# Allegro board democ4.brd
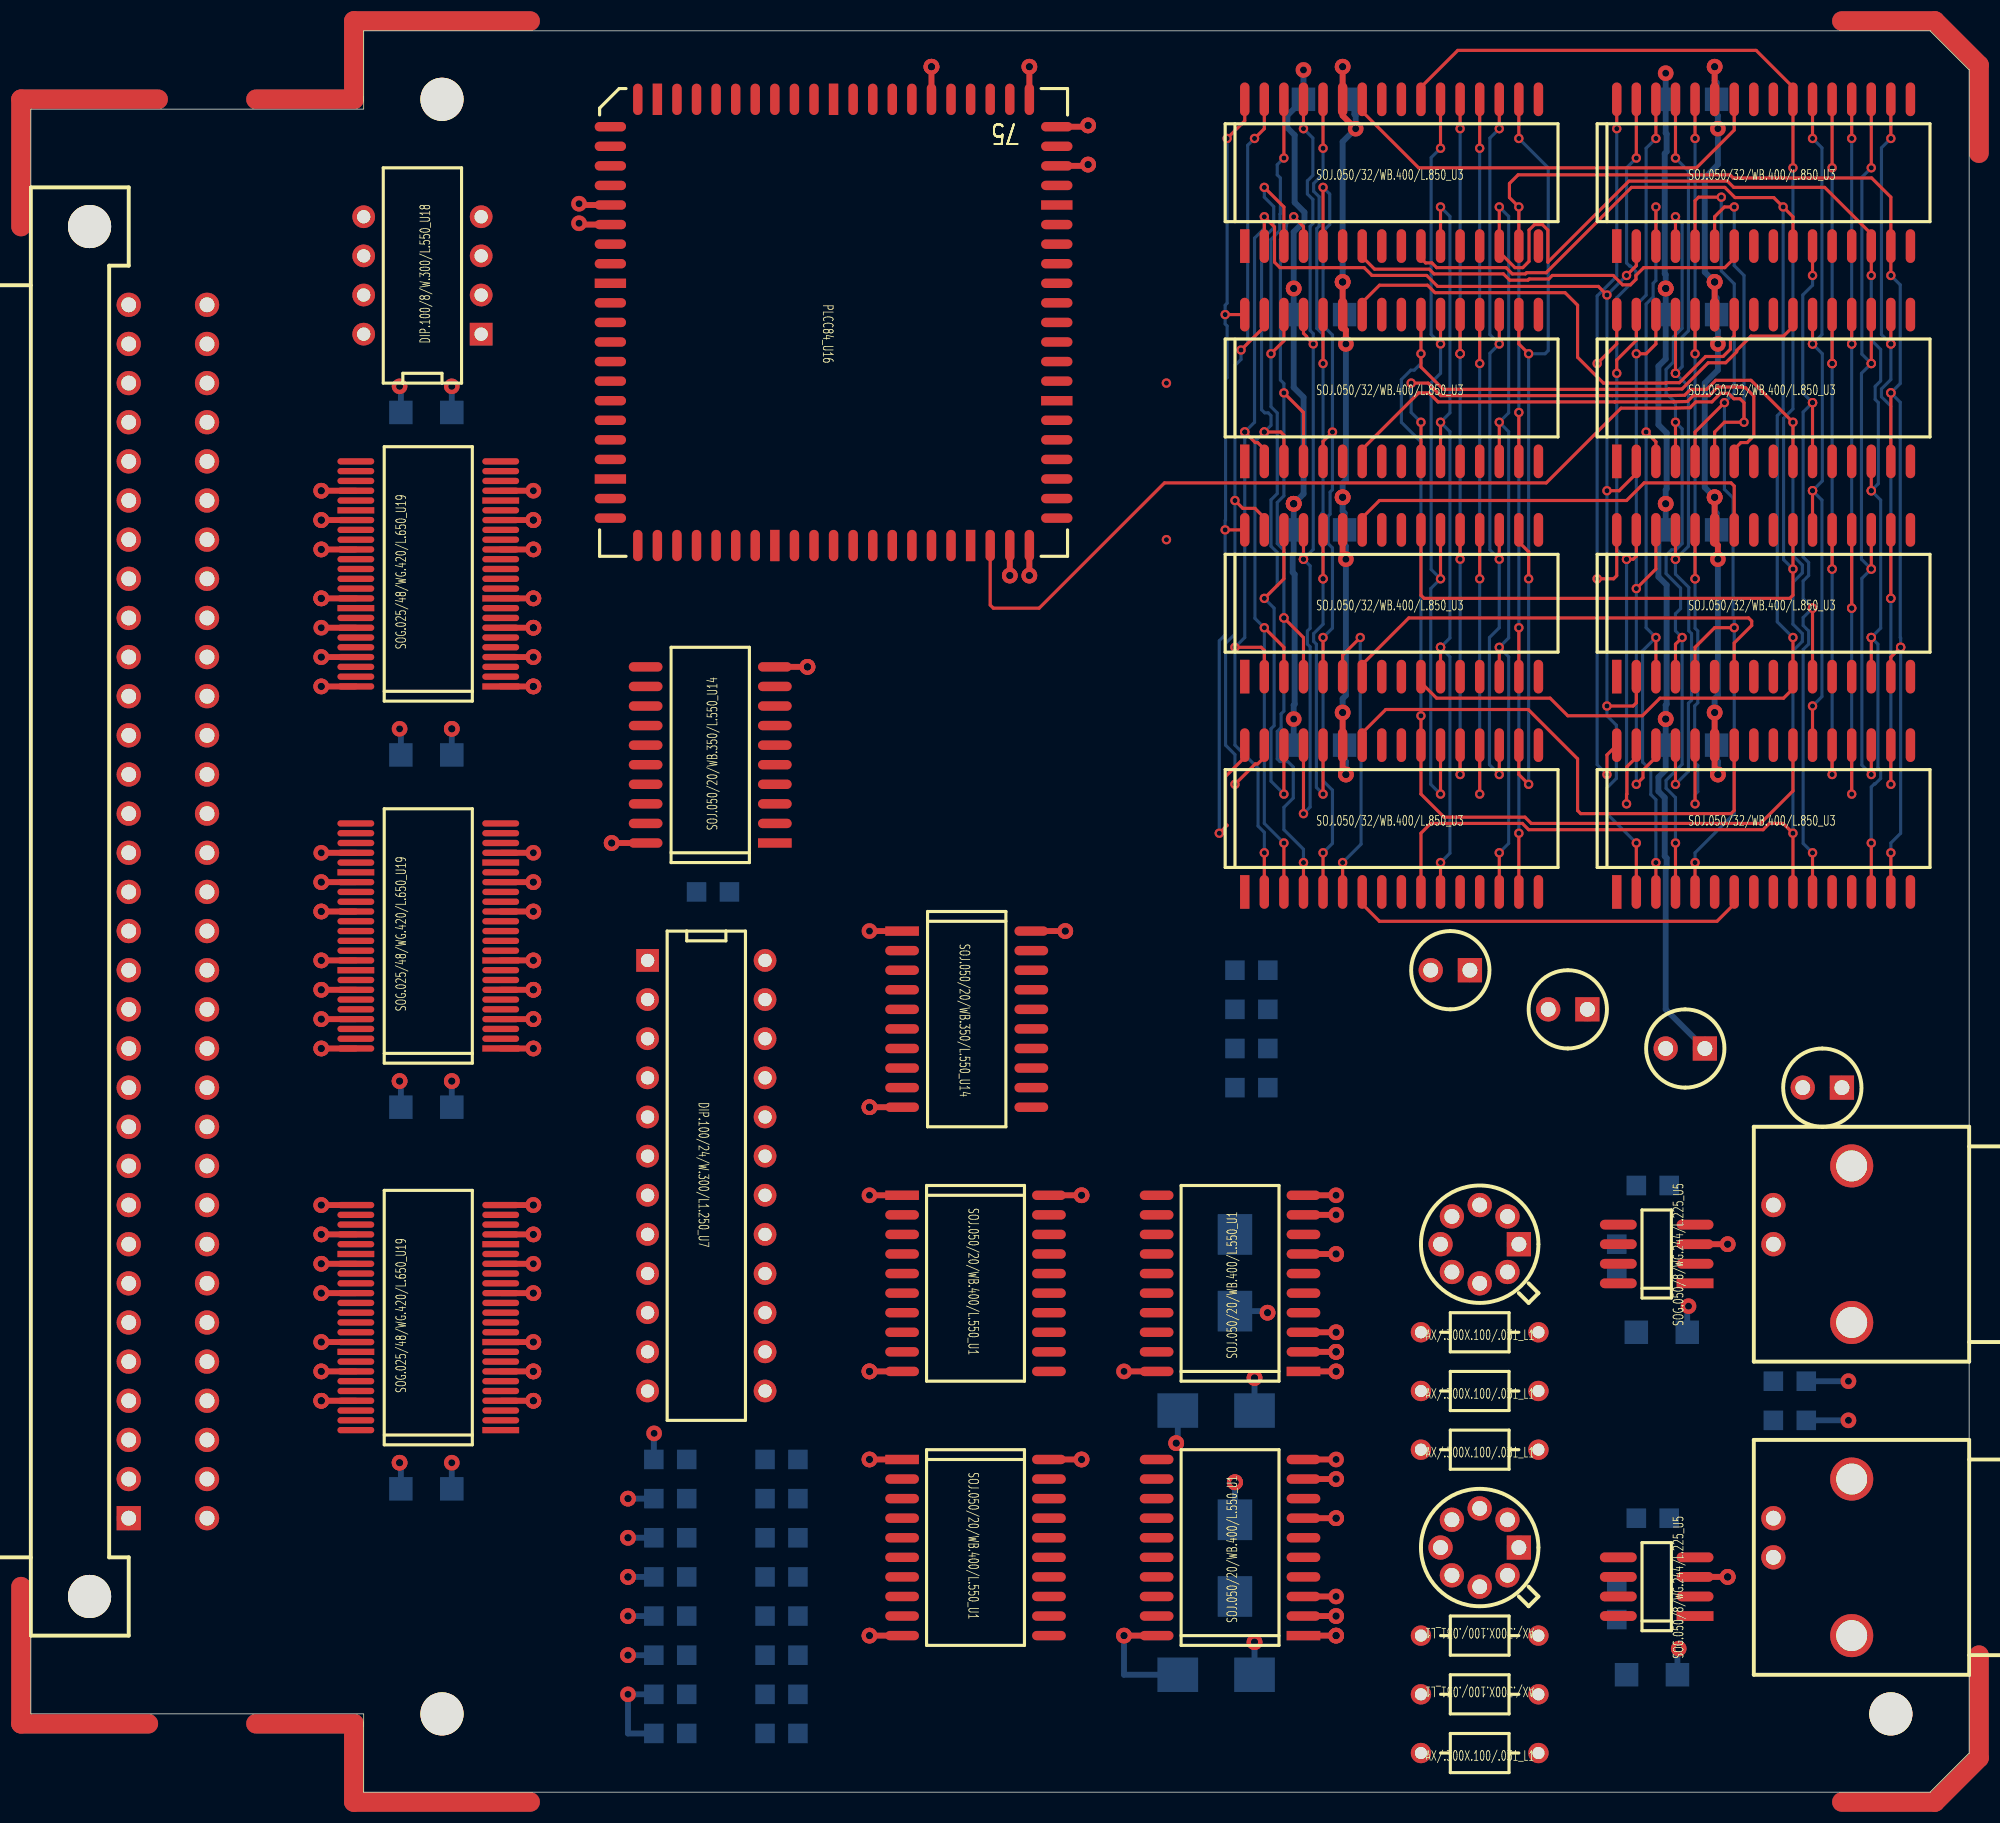
[diagram p0: board, top side]
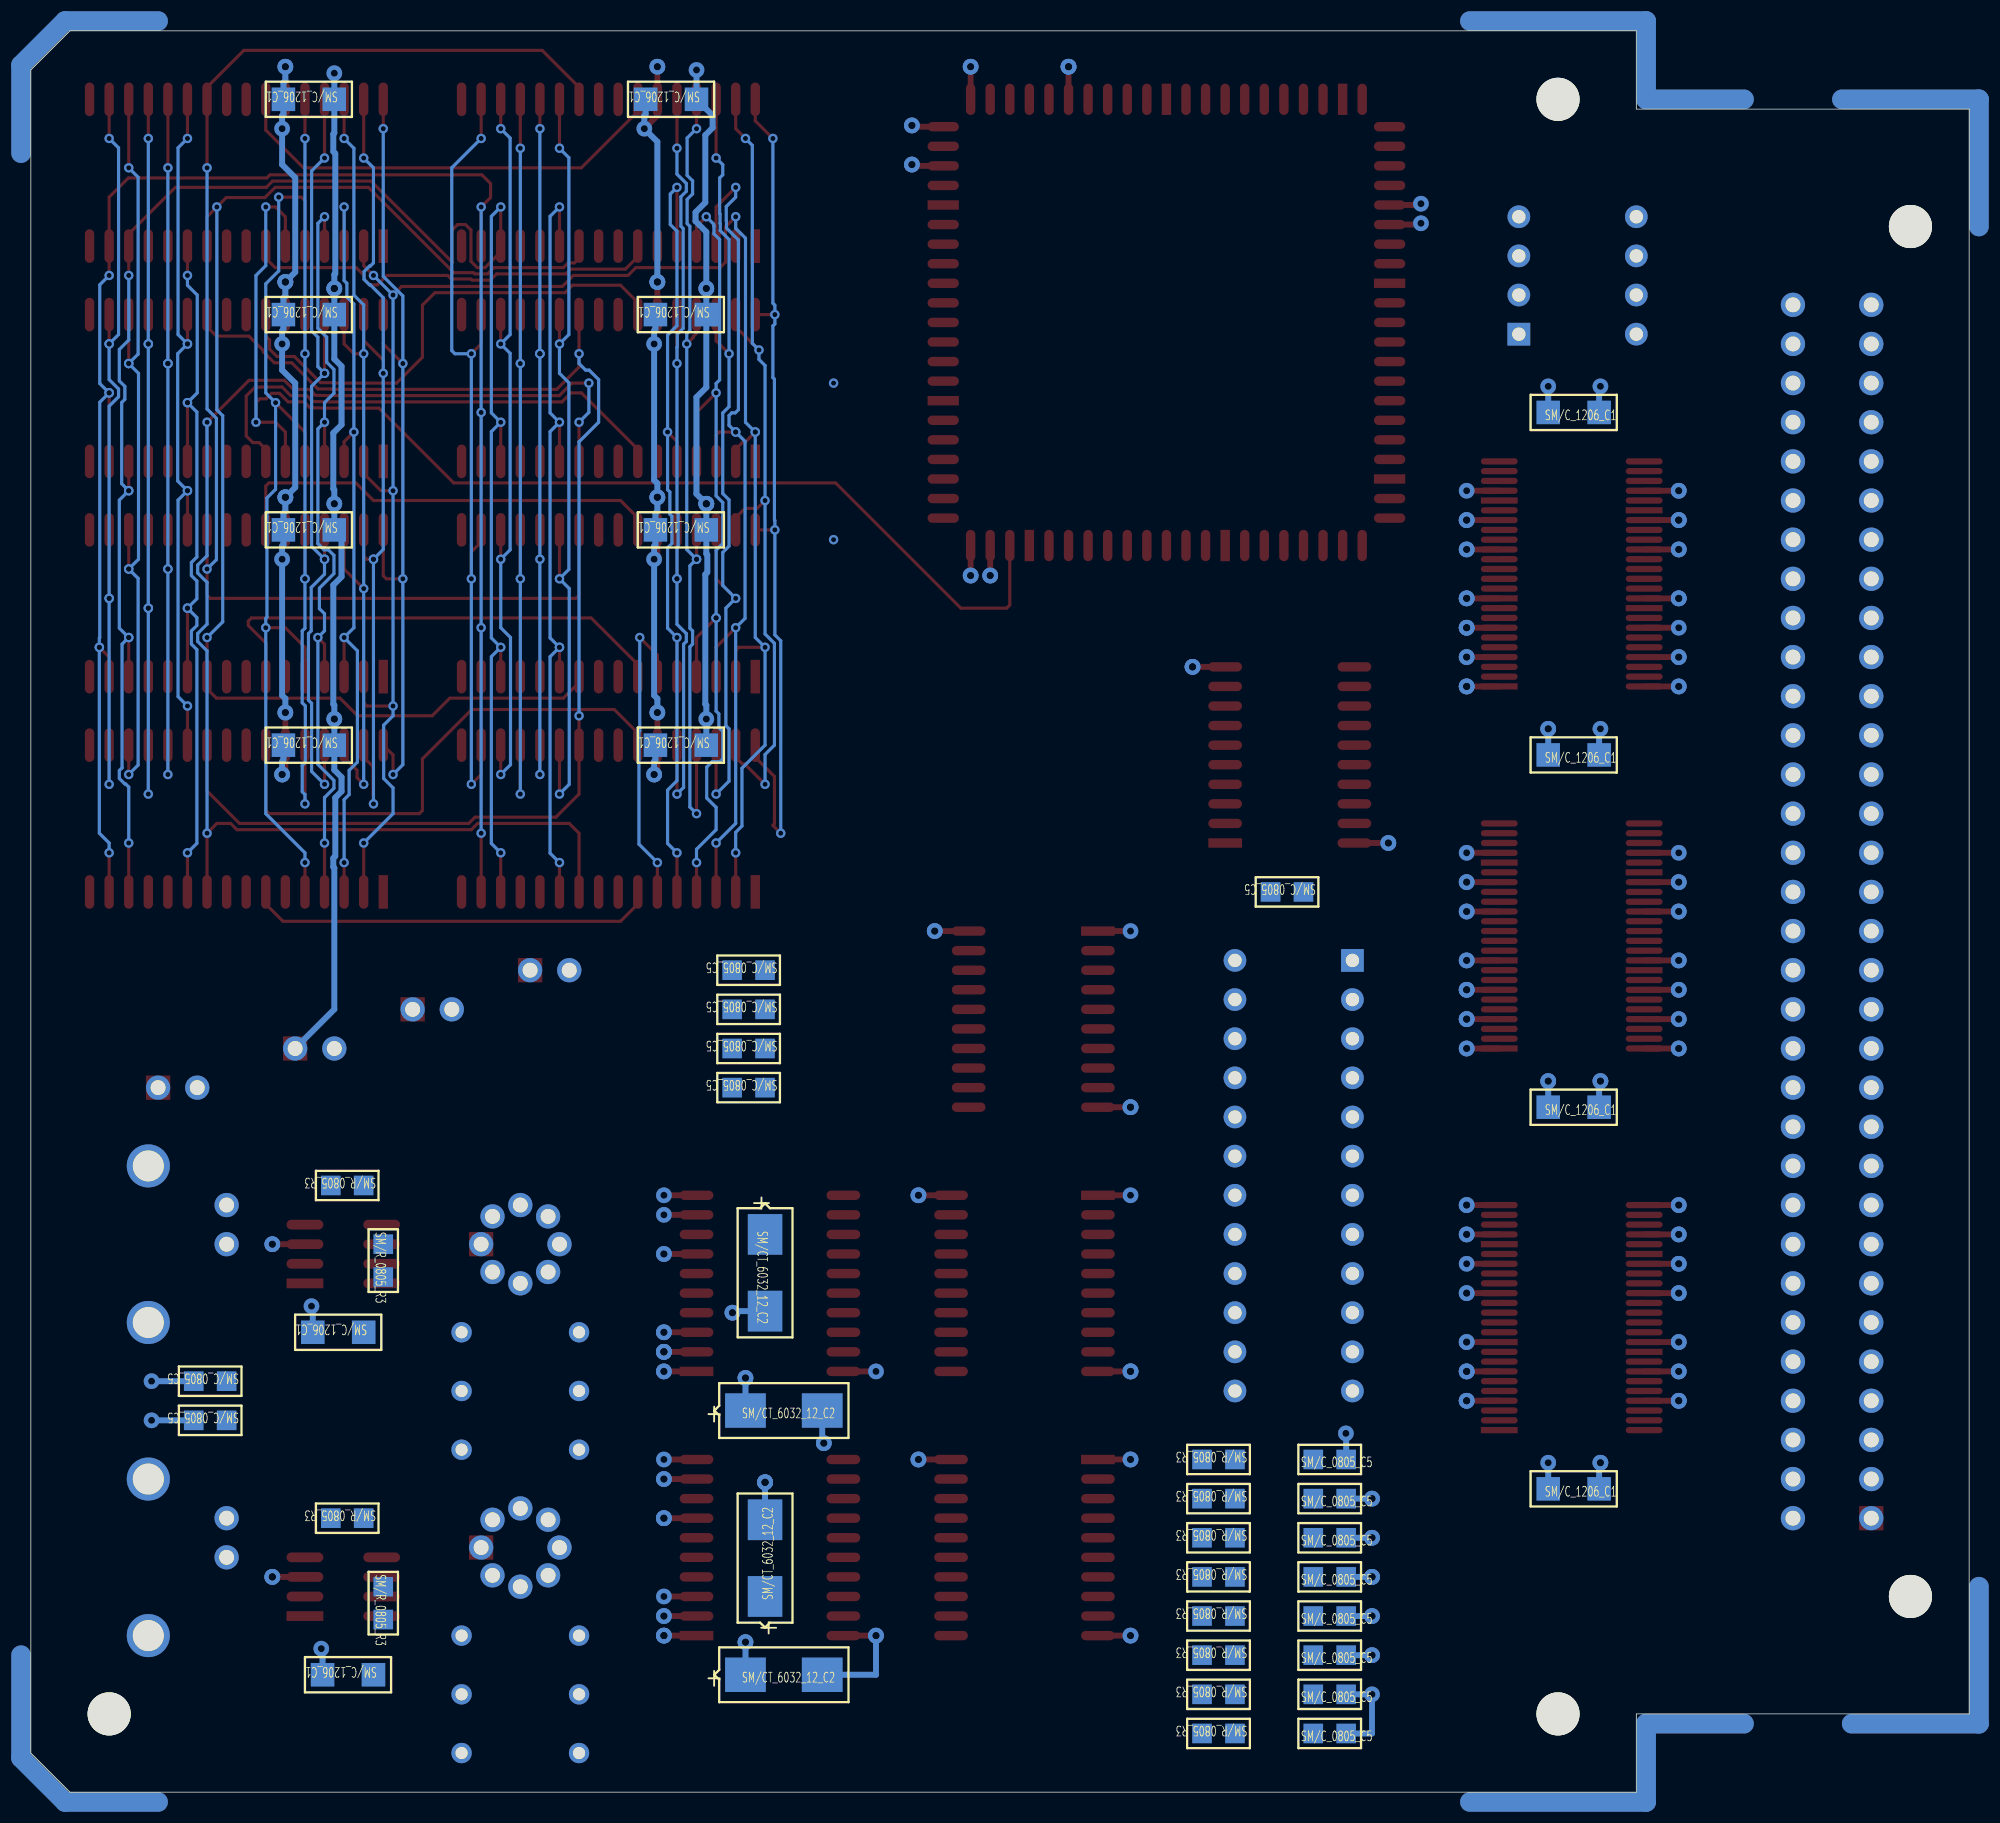
[diagram p1: board, bottom side, seen from below]

Outline 125.73 x 114.3 mm; copper layers: TOP, GND, POWER, BOTTOM. Coordinates in mm from the lower left corner of the outline.
Outline path: 0,109.22 21.59,109.22 21.59,114.3 123.19,114.3 125.73,111.76 125.73,2.54 123.19,0 21.59,0 21.59,5.08 0,5.08 0,109.22

## Design rules (mm)
nets with their own width: min track width 0.203; nets A0 A1 A2 A3 A4 A5 A6 A7 A8 A9 A10 A11 A12 A13 A14 A15 A16 A17 A18 A19 A20 A21 A22 A23 AEN/ BA0 BA1 BA2 BA3 BD0 BD1 BD2 BD3 BD4 BD5 BD6 BD7 BD8 BD9 BD10 BD11 BD12 BD13 BD14 BD15 BRD/ BRESET BWR/ D0 D1 D2 D3 D4 D5 D6 D7 D9 D10 D11 D12 D13 D14 D15 DDIR DEN/ DHEN/ FPGA/ GAIN HS/ MCLK MRD/ MWR/ N00036 N00036_6360 N00038 N00038_6372 N00044 N00044_6366 N00046 N00046_6362 N00048 N00048_6359 N00060 N00060_6368 N00306 N00318 N00322 N00671 N00689 N00703 N00717 N00827 N00831 N00835 N00837 N04966 N05690 N05692 N05694 N05696 N05698 N05700 N05702 N05704 N11940 N11950 N11984 N11994 N12004 N19706 N19710 N19714 N19718 N19934 N19938 N19942 N23417 N23878 N24816 N24821 N24826 N84247 N103899 N255822 N314771 N315146 N315333 N320476 N336036 N336041 OUTA OUTC RA0 RA1 RA2 RA3 RA4 RA5 RA6 RA7 RA8 RA9 RA10 RA11 RA12 RA13 RA14 RA15 RD0 RD1 RD2 RD3 RD4 RD5 RD6 RD7 RDY/ RESET/ SEL VCLKA VCLKC VD0 VD1 VD2 VD3 VD4 VD5 VD6 VD7 WAIT/ WSTAT/
nets with their own width: min track width 0.381; nets AGND GND GND_EARTH V12N V+12 VCC

## Placement (name value [footprint] x y rotation side)
C1  .1UF  [SMC1206]  104.14 29.84 0 bottom
C2  .1UF  [SMCT603212]  79.38 24.77 180 bottom
C3  .1UF  [SMCT603212]  79.38 7.62 180 bottom
C4  .1UF  [SMC1206]  106.05 109.86 0 bottom
C5  3300  [SMC0805]  42.55 6.35 180 bottom
C6  .1UF  [SMC1206]  103.51 7.62 0 bottom
C7  3300  [SMC0805]  42.55 21.59 180 bottom
C8  3300  [SMC0805]  42.55 8.89 180 bottom
C9  .1UF  [SMC1206]  27.3 89.53 180 bottom
C10  .1UF  [SMC1206]  27.3 67.31 180 bottom
C11  .1UF  [SMC1206]  27.3 44.45 180 bottom
C12  .1UF  [SMC1206]  106.05 81.91 0 bottom
C13  .1UF  [SMC1206]  106.05 95.89 0 bottom
C14  .1UF  [SMC1206]  106.05 67.95 0 bottom
C15  .1UF  [SMC1206]  27.3 19.69 180 bottom
C16  3300  [SMC0805]  42.55 11.43 180 bottom
C17  3300  [SMC0805]  42.55 13.97 180 bottom
C18  47PF  [SMC0805]  113.03 26.67 0 bottom
C19  3300  [SMC0805]  42.55 3.81 180 bottom
C20  3300  [SMC0805]  42.55 16.51 180 bottom
C21  .1UF  [SMCT603212]  78.11 12.7 90 bottom
C22  .1UF  [SMCT603212]  78.11 36.2 270 bottom
C23  47PF  [SMC0805]  113.03 24.13 0 bottom
C24  3300  [SMC0805]  42.55 19.05 180 bottom
C25  .1UF  [SMC1206]  82.55 109.86 0 bottom
C26  .1UF  [SMC1206]  81.92 95.89 0 bottom
C27  .1UF  [SMC1206]  81.92 81.91 0 bottom
C28  .1UF  [SMC1206]  81.92 67.95 0 bottom
D1  DIODE PHOTO EMIT  [LED]  100.97 50.8 180 top
D2  DIODE PHOTO EMIT  [LED]  93.34 53.34 180 top
D3  DIODE PHOTO EMIT  [LED]  108.59 48.26 180 top
D4  DIODE PHOTO EMIT  [LED]  117.48 45.72 180 top
J1  CON PAD  [DIN64P]  6.35 17.78 90 top
J2  CHANNEL 1  [BNC2P]  113.03 15.24 270 top
J3  CHANNEL 2  [BNC2P]  113.03 35.56 270 top
L1  50  [AX300X100031]  90.17 22.23 0 top
L2  50  [AX300X100031]  90.17 29.84 0 top
L3  50  [AX300X100031]  97.79 6.35 180 top
L4  50  [AX300X100031]  90.17 26.03 0 top
L5  50  [AX300X100031]  97.79 10.16 180 top
L6  50  [AX300X100031]  90.17 2.54 0 top
MTH1  -  [MTHOLE1]  26.67 109.86 0 top
MTH2  -  [MTHOLE1]  26.67 5.08 0 top
MTH3  -  [MTHOLE1]  120.65 5.08 0 top
R1  150  [SMC0805]  78.11 53.34 0 bottom
R2  150  [SMC0805]  78.11 50.8 0 bottom
R3  100  [SMR0805]  104.14 17.78 0 bottom
R4  100  [SMR0805]  102.87 13.34 270 bottom
R5  100  [SMR0805]  102.87 35.56 270 bottom
R6  100  [SMR0805]  104.14 39.37 0 bottom
R7  50  [SMR0805]  47.62 21.59 0 bottom
R8  50  [SMR0805]  47.62 8.89 0 bottom
R9  50  [SMR0805]  47.62 11.43 0 bottom
R10  50  [SMR0805]  47.62 6.35 0 bottom
R11  50  [SMC0805]  43.18 58.42 0 bottom
R12  150  [SMC0805]  78.11 45.72 0 bottom
R13  50  [SMR0805]  47.62 19.05 0 bottom
R14  50  [SMR0805]  47.62 16.51 0 bottom
R15  50  [SMR0805]  47.62 13.97 0 bottom
R16  50  [SMR0805]  47.62 3.81 0 bottom
R17  150  [SMC0805]  78.11 48.26 0 bottom
U1  TLC5602A  [SOJ05020WB400L550]  82.55 10.16 90 top
U2  TLC5602A  [SOJ05020WB400L550]  82.55 27.3 90 top
U3  TC55B4257J  [SOJ05032WB400L850]  102.87 86.36 0 top
U4  TC55B4257J  [SOJ05032WB400L850]  102.87 100.33 0 top
U5  DG419A  [SOG0508WG244L225]  107.95 33.02 90 top
U6  DG419A  [SOG0508WG244L225]  107.95 11.43 90 top
U7  20L10  [DIP10024W300L1250]  40 53.98 270 top
U8  TC55B4257J  [SOJ05032WB400L850]  78.74 72.39 0 top
U9  TC55B4257J  [SOJ05032WB400L850]  78.74 100.33 0 top
U10  TC55B4257J  [SOJ05032WB400L850]  102.87 72.39 0 top
U11  TC55B4257J  [SOJ05032WB400L850]  102.87 58.42 0 top
U12  TC55B4257J  [SOJ05032WB400L850]  78.74 58.42 0 top
U13  TC55B4257J  [SOJ05032WB400L850]  78.74 86.36 0 top
U14  ACT574  [SOJ05020WB350L550]  56.52 55.88 270 top
U15  ACT574  [SOJ05020WB400L550]  56.52 21.59 270 top
U16  EPF8282  [PLCC84]  52.07 109.86 270 top
U17  ACT574  [SOJ05020WB400L550]  56.52 38.73 270 top
U18  EPC1064  [DIP1008W300L550]  29.21 94.61 90 top
U19  FCT16245  [SOG02548WG420L650]  30.48 71.75 90 top
U20  FCT16245  [SOG02548WG420L650]  30.48 23.49 90 top
U21  FCT16245  [SOG02548WG420L650]  30.48 48.26 90 top
U22  TLE2037A  [TO-99]  96.52 35.56 90 top
U23  TLE2037A  [TO-99]  96.52 15.88 90 top
U25  74ACT574  [SOJ05020WB350L550]  48.26 61.59 90 top

## Library data of the parts
C1-C3 C5-C8 C16 C17 C19-C22 C24 = CAP: alternate symbols: (SMCT603212;SMC0805)
C4 C9-C15 C25-C28 = CAP_NP
C18 C23 = CAPACITOR
D1-D4 = DIODE_PHOTO_EMIT
J1 = 64CONSEPPINS
J2 J3 = BNC
L1-L6 = INDUCTOR
MTH1-MTH3 = MTHOLE1
R1-R17 = R: alternate symbols: (SMR0805)
U1 U2 = TLC5602A
U3 U4 U8-U13 = TC56B4257J
U5 U6 = DG419A
U7 = 20L10
U14 U15 U17 = ACT574: alternate symbols: (SOJ05020WB400L550)
U16 = FPGA_0
U18 = EPC1064
U19-U21 = FCT16245
U22 U23 = TLE2037A
U25 = 74ACT574

## Footprints (pads in the part's own frame, mm; a bottom-side part is the same pattern mirrored in y, then rotated)
AX300X100031
  round 1.321 hole 0.787: 1(0,0) 2(7.62,0)
BNC2P
  round 1.575 hole 0.965: 1(0,0) 2(-2.54,0)
  round 2.794 hole 2.007: 3(5.08,5.08) 4(-5.08,5.08)
DIN64P
  rect 1.575x1.575 hole 0.965: 1(0,0)
  round 1.575 hole 0.965: 2(2.54,0) 3(5.08,0) 4(7.62,0) 5(10.16,0) 6(12.7,0) 7(15.24,0) 8(17.78,0) 9(20.32,0) 10(22.86,0) 11(25.4,0) 12(27.94,0) 13(30.48,0) 14(33.02,0) 15(35.56,0) 16(38.1,0) 17(40.64,0) 18(43.18,0) 19(45.72,0) 20(48.26,0) 21(50.8,0) 22(53.34,0) 23(55.88,0) 24(58.42,0) 25(60.96,0) 26(63.5,0) 27(66.04,0) 28(68.58,0) 29(71.12,0) 30(73.66,0) 31(76.2,0) 32(78.74,0) 33(0,-5.08) 34(2.54,-5.08) 35(5.08,-5.08) 36(7.62,-5.08) 37(10.16,-5.08) 38(12.7,-5.08) 39(15.24,-5.08) 40(17.78,-5.08) 41(20.32,-5.08) 42(22.86,-5.08) 43(25.4,-5.08) 44(27.94,-5.08) 45(30.48,-5.08) 46(33.02,-5.08) 47(35.56,-5.08) 48(38.1,-5.08) 49(40.64,-5.08) 50(43.18,-5.08) 51(45.72,-5.08) 52(48.26,-5.08) 53(50.8,-5.08) 54(53.34,-5.08) 55(55.88,-5.08) 56(58.42,-5.08) 57(60.96,-5.08) 58(63.5,-5.08) 59(66.04,-5.08) 60(68.58,-5.08) 61(71.12,-5.08) 62(73.66,-5.08) 63(76.2,-5.08) 64(78.74,-5.08)
  round 2.794 hole 2.794: 65(83.82,2.54) 66(-5.08,2.54)
DIP1008W300L550
  rect 1.473x1.473 hole 0.864: 1(0,0)
  round 1.473 hole 0.864: 2(2.54,0) 3(5.08,0) 4(7.62,0) 5(7.62,7.62) 6(5.08,7.62) 7(2.54,7.62) 8(0,7.62)
DIP10024W300L1250
  rect 1.473x1.473 hole 0.864: 1(0,0)
  round 1.473 hole 0.864: 2(2.54,0) 3(5.08,0) 4(7.62,0) 5(10.16,0) 6(12.7,0) 7(15.24,0) 8(17.78,0) 9(20.32,0) 10(22.86,0) 11(25.4,0) 12(27.94,0) 13(27.94,7.62) 14(25.4,7.62) 15(22.86,7.62) 16(20.32,7.62) 17(17.78,7.62) 18(15.24,7.62) 19(12.7,7.62) 20(10.16,7.62) 21(7.62,7.62) 22(5.08,7.62) 23(2.54,7.62) 24(0,7.62)
LED
  rect 1.575x1.575 hole 0.965: 1(0,0)
  round 1.575 hole 0.965: 2(2.54,0)
MTHOLE1
  round 2.794 hole 2.794: 1(0,0)
PLCC84
  rect 2.032x0.61 smd: 1(0,0) 10(0,-11.43) 40(28.956,-3.81) 50(28.956,8.89)
  oval 2.032x0.61 smd: 2(0,-1.27) 3(0,-2.54) 4(0,-3.81) 5(0,-5.08) 6(0,-6.35) 7(0,-7.62) 8(0,-8.89) 9(0,-10.16) 11(0,-12.7) 33(28.956,-12.7) 34(28.956,-11.43) 35(28.956,-10.16) 36(28.956,-8.89) 37(28.956,-7.62) 38(28.956,-6.35) 39(28.956,-5.08) 41(28.956,-2.54) 42(28.956,-1.27) 43(28.956,0) 44(28.956,1.27) 45(28.956,2.54) 46(28.956,3.81) 47(28.956,5.08) 48(28.956,6.35) 49(28.956,7.62) 51(28.956,10.16) 52(28.956,11.43) 53(28.956,12.7) 75(0,12.7) 76(0,11.43) 77(0,10.16) 78(0,8.89) 79(0,7.62) 80(0,6.35) 81(0,5.08) 82(0,3.81) 83(0,2.54) 84(0,1.27)
  oval 0.61x2.032 smd: 12(1.778,-14.478) 13(3.048,-14.478) 14(4.318,-14.478) 15(5.588,-14.478) 16(6.858,-14.478) 17(8.128,-14.478) 18(9.398,-14.478) 19(10.668,-14.478) 21(13.208,-14.478) 22(14.478,-14.478) 23(15.748,-14.478) 24(17.018,-14.478) 25(18.288,-14.478) 26(19.558,-14.478) 27(20.828,-14.478) 28(22.098,-14.478) 29(23.368,-14.478) 31(25.908,-14.478) 32(27.178,-14.478) 54(27.178,14.478) 55(25.908,14.478) 56(24.638,14.478) 57(23.368,14.478) 58(22.098,14.478) 59(20.828,14.478) 61(18.288,14.478) 62(17.018,14.478) 63(15.748,14.478) 64(14.478,14.478) 65(13.208,14.478) 66(11.938,14.478) 67(10.668,14.478) 68(9.398,14.478) 69(8.128,14.478) 71(5.588,14.478) 72(4.318,14.478) 73(3.048,14.478) 74(1.778,14.478)
  rect 0.61x2.032 smd: 20(11.938,-14.478) 30(24.638,-14.478) 60(19.558,14.478) 70(6.858,14.478)
SMC0805
  rect 1.27x1.27 smd: 1(0,0) 2(2.134,0)
SMC1206
  rect 1.524x1.524 smd: 1(0,0) 2(3.302,0)
SMCT603212
  rect 2.642x2.235 smd: 1(0,0) 2(4.978,0)
SMR0805
  rect 1.27x1.27 smd: 1(0,0) 2(2.134,0)
SOG0508WG244L225
  rect 0.635x2.388 smd: 1(0,0)
  oval 0.635x2.388 smd: 2(1.27,0) 3(2.54,0) 4(3.81,0) 5(3.81,4.978) 6(2.54,4.978) 7(1.27,4.978) 8(0,4.978)
SOG02548WG420L650
  rect 0.406x2.388 smd: 1(0,0) 10(5.715,0) 20(12.065,0) 30(11.43,9.398) 40(5.08,9.398)
  oval 0.406x2.388 smd: 2(0.635,0) 3(1.27,0) 4(1.905,0) 5(2.54,0) 6(3.175,0) 7(3.81,0) 8(4.445,0) 9(5.08,0) 11(6.35,0) 12(6.985,0) 13(7.62,0) 14(8.255,0) 15(8.89,0) 16(9.525,0) 17(10.16,0) 18(10.795,0) 19(11.43,0) 21(12.7,0) 22(13.335,0) 23(13.97,0) 24(14.605,0) 25(14.605,9.398) 26(13.97,9.398) 27(13.335,9.398) 28(12.7,9.398) 29(12.065,9.398) 31(10.795,9.398) 32(10.16,9.398) 33(9.525,9.398) 34(8.89,9.398) 35(8.255,9.398) 36(7.62,9.398) 37(6.985,9.398) 38(6.35,9.398) 39(5.715,9.398) 41(4.445,9.398) 42(3.81,9.398) 43(3.175,9.398) 44(2.54,9.398) 45(1.905,9.398) 46(1.27,9.398) 47(0.635,9.398) 48(0,9.398)
SOJ05020WB350L550
  rect 0.61x2.184 smd: 1(0,0)
  oval 0.61x2.184 smd: 2(1.27,0) 3(2.54,0) 4(3.81,0) 5(5.08,0) 6(6.35,0) 7(7.62,0) 8(8.89,0) 9(10.16,0) 10(11.43,0) 11(11.43,8.382) 12(10.16,8.382) 13(8.89,8.382) 14(7.62,8.382) 15(6.35,8.382) 16(5.08,8.382) 17(3.81,8.382) 18(2.54,8.382) 19(1.27,8.382) 20(0,8.382)
SOJ05020WB400L550
  rect 0.61x2.184 smd: 1(0,0)
  oval 0.61x2.184 smd: 2(1.27,0) 3(2.54,0) 4(3.81,0) 5(5.08,0) 6(6.35,0) 7(7.62,0) 8(8.89,0) 9(10.16,0) 10(11.43,0) 11(11.43,9.525) 12(10.16,9.525) 13(8.89,9.525) 14(7.62,9.525) 15(6.35,9.525) 16(5.08,9.525) 17(3.81,9.525) 18(2.54,9.525) 19(1.27,9.525) 20(0,9.525)
SOJ05032WB400L850
  rect 0.61x2.184 smd: 1(0,0)
  oval 0.61x2.184 smd: 2(1.27,0) 3(2.54,0) 4(3.81,0) 5(5.08,0) 6(6.35,0) 7(7.62,0) 8(8.89,0) 9(10.16,0) 10(11.43,0) 11(12.7,0) 12(13.97,0) 13(15.24,0) 14(16.51,0) 15(17.78,0) 16(19.05,0) 17(19.05,9.525) 18(17.78,9.525) 19(16.51,9.525) 20(15.24,9.525) 21(13.97,9.525) 22(12.7,9.525) 23(11.43,9.525) 24(10.16,9.525) 25(8.89,9.525) 26(7.62,9.525) 27(6.35,9.525) 28(5.08,9.525) 29(3.81,9.525) 30(2.54,9.525) 31(1.27,9.525) 32(0,9.525)
TO-99
  rect 1.575x1.575 hole 0.965: 1(0,0)
  round 1.575 hole 0.965: 2(1.803,0.737) 3(2.54,2.54) 4(1.803,4.343) 5(0,5.08) 6(-1.803,4.343) 7(-2.54,2.54) 8(-1.803,0.737)

## Nets
AGND: C1.2(TP-2) C6.2(TP-2) C21.2(TP-2) C22.2(TP-2) J1.1(TP-1) J1.2(TP-2) J1.33(TP-33) U1.3(TP-3) U1.7(TP-7) U1.10(TP-10) U2.3(TP-3) U2.7(TP-7) U2.10(TP-10) U5.3(TP-3) U6.3(TP-3)
GND: C2.2(TP-2) C3.2(TP-2) C4.2(TP-2) C5.2(TP-2) C7.2(TP-2) C8.2(TP-2) C9.2(TP-2) C10.2(TP-2) C11.2(TP-2) C12.2(TP-2) C13.2(TP-2) C14.2(TP-2) C15.2(TP-2) C16.2(TP-2) C17.2(TP-2) C19.2(TP-2) C20.2(TP-2) C24.2(TP-2) C25.2(TP-2) C26.2(TP-2) C27.2(TP-2) C28.2(TP-2) J1.3(TP-3) J1.34(TP-34) J1.35(TP-35) J1.36(TP-36) U1.1(TP-1) U1.20(TP-20) U2.1(TP-1) U2.20(TP-20) U3.27(TP-27) U4.27(TP-27) U7.11(TP-11) U7.12(TP-12) U7.13(TP-13) U8.27(TP-27) U9.27(TP-27) U10.27(TP-27) U11.27(TP-27) U12.27(TP-27) U13.27(TP-27) U14.1(TP-1) U14.10(TP-10) U15.1(TP-1) U15.10(TP-10) U16.17(TP-17) U16.53(TP-53) U16.74(TP-74) U16.75(TP-75) U17.1(TP-1) U17.10(TP-10) U19.1(TP-1) U19.4(TP-4) U19.10(TP-10) U19.15(TP-15) U19.21(TP-21) U19.28(TP-28) U19.34(TP-34) U19.39(TP-39) U19.45(TP-45) U19.48(TP-48) U20.4(TP-4) U20.10(TP-10) U20.15(TP-15) U20.21(TP-21) U20.24(TP-24) U20.25(TP-25) U20.28(TP-28) U20.34(TP-34) U20.39(TP-39) U20.45(TP-45) U21.1(TP-1) U21.4(TP-4) U21.10(TP-10) U21.15(TP-15) U21.21(TP-21) U21.28(TP-28) U21.34(TP-34) U21.39(TP-39) U21.45(TP-45) U21.48(TP-48) U25.10(TP-10)
GND_EARTH: C18.2(TP-2) C23.2(TP-2) J2.2(TP-2) J3.2(TP-2)
V12N: J1.31(TP-31) J1.32(TP-32) U5.7(TP-7) U6.7(TP-7) U22.4(TP-4) U23.4(TP-4)
VCC: C2.1(TP-1) C3.1(TP-1) C4.1(TP-1) C9.1(TP-1) C10.1(TP-1) C11.1(TP-1) C12.1(TP-1) C13.1(TP-1) C14.1(TP-1) C15.1(TP-1) C25.1(TP-1) C26.1(TP-1) C27.1(TP-1) C28.1(TP-1) D1.1(TP-1) D2.1(TP-1) D3.1(TP-1) D4.1(TP-1) J1.29(TP-29) J1.30(TP-30) J1.62(TP-62) L2.1(TP-1) L6.1(TP-1) U1.2(TP-2) U1.9(TP-9) U2.2(TP-2) U2.9(TP-9) U7.24(TP-24) U14.20(TP-20) U15.20(TP-20) U16.16(TP-16) U16.52(TP-52) U16.72(TP-72) U16.80(TP-80) U17.20(TP-20) U19.7(TP-7) U19.18(TP-18) U19.31(TP-31) U19.42(TP-42) U20.7(TP-7) U20.18(TP-18) U20.31(TP-31) U20.42(TP-42) U21.7(TP-7) U21.18(TP-18) U21.31(TP-31) U21.42(TP-42) U25.20(TP-20)
A0: J1.54(TP-54) U19.47(TP-47)
A1: J1.55(TP-55) U19.46(TP-46)
A2: J1.56(TP-56) U19.44(TP-44)
A3: J1.57(TP-57) U19.43(TP-43)
A4: J1.58(TP-58) U19.41(TP-41)
A5: J1.59(TP-59) U19.40(TP-40)
A6: J1.60(TP-60) U19.38(TP-38)
A7: J1.61(TP-61) U19.37(TP-37)
A8: J1.13(TP-13) U21.47(TP-47)
A9: J1.14(TP-14) U21.46(TP-46)
A10: J1.15(TP-15) U21.44(TP-44)
A11: J1.16(TP-16) U21.43(TP-43)
A12: J1.17(TP-17) U21.41(TP-41)
A13: J1.18(TP-18) U21.40(TP-40)
A14: J1.19(TP-19) U21.38(TP-38)
A15: J1.20(TP-20) U21.37(TP-37)
A16: J1.37(TP-37) U20.36(TP-36)
A17: J1.38(TP-38) U20.35(TP-35)
A18: J1.39(TP-39) U7.6(TP-6) U20.33(TP-33)
A19: J1.40(TP-40) U7.5(TP-5) U20.32(TP-32)
A20: J1.41(TP-41) U7.4(TP-4) U20.30(TP-30)
A21: J1.42(TP-42) U7.3(TP-3) U20.29(TP-29)
A22: J1.43(TP-43) U7.2(TP-2) U20.27(TP-27)
A23: J1.44(TP-44) U7.1(TP-1) U20.26(TP-26)
AEN/: J1.47(TP-47) U7.8(TP-8)
BA0: U16.6(TP-6) U19.2(TP-2) U20.13(TP-13) U21.2(TP-2)
BA1: U16.7(TP-7) U19.3(TP-3) U20.14(TP-14) U21.3(TP-3)
BA2: U16.8(TP-8) U19.5(TP-5) U20.16(TP-16) U21.5(TP-5)
BA3: U16.9(TP-9) U19.6(TP-6) U20.17(TP-17) U21.6(TP-6)
BD0: U16.25(TP-25) U19.13(TP-13)
BD1: U16.24(TP-24) U19.14(TP-14)
BD2: U16.23(TP-23) U19.16(TP-16)
BD3: U16.22(TP-22) U19.17(TP-17)
BD4: U16.21(TP-21) U19.19(TP-19)
BD5: U16.20(TP-20) U19.20(TP-20)
BD6: U16.19(TP-19) U19.22(TP-22)
BD7: U16.18(TP-18) U19.23(TP-23)
BD8: U20.2(TP-2) U21.23(TP-23)
BD9: U20.3(TP-3) U21.22(TP-22)
BD10: U20.5(TP-5) U21.20(TP-20)
BD11: U20.6(TP-6) U21.19(TP-19)
BD12: U20.8(TP-8) U21.17(TP-17)
BD13: U20.9(TP-9) U21.16(TP-16)
BD14: U20.11(TP-11) U21.14(TP-14)
BD15: U20.12(TP-12) U21.13(TP-13)
BRD/: U7.15(TP-15) U16.73(TP-73)
BRESET: U7.14(TP-14) U16.12(TP-12)
BWR/: U7.16(TP-16) U16.54(TP-54)
D0: J1.28(TP-28) U19.26(TP-26) U21.26(TP-26)
D1: J1.27(TP-27) U19.27(TP-27) U21.27(TP-27)
D2: J1.26(TP-26) U19.29(TP-29) U21.29(TP-29)
D3: J1.25(TP-25) U19.30(TP-30) U21.30(TP-30)
D4: J1.24(TP-24) U19.32(TP-32) U21.32(TP-32)
D5: J1.23(TP-23) U19.33(TP-33) U21.33(TP-33)
D6: J1.4(TP-4) J1.22(TP-22) U19.35(TP-35) U20.47(TP-47) U21.35(TP-35)
D7: J1.21(TP-21) U19.36(TP-36) U21.36(TP-36)
D9: J1.5(TP-5) U20.46(TP-46)
D10: J1.6(TP-6) U20.44(TP-44)
D11: J1.7(TP-7) U20.43(TP-43)
D12: J1.8(TP-8) U20.41(TP-41)
D13: J1.9(TP-9) U20.40(TP-40)
D14: J1.10(TP-10) U20.38(TP-38)
D15: J1.11(TP-11) U20.37(TP-37)
DDIR: U7.19(TP-19) U19.24(TP-24) U20.1(TP-1) U21.24(TP-24)
DEN/: U7.20(TP-20) U19.25(TP-25) U20.48(TP-48)
DHEN/: U7.21(TP-21) U21.25(TP-25)
FPGA/: U7.17(TP-17) U16.30(TP-30)
GAIN: U5.6(TP-6) U6.6(TP-6) U16.28(TP-28)
HS/: U7.18(TP-18) U16.29(TP-29)
MCLK: J1.52(TP-52) U16.31(TP-31)
MRD/: J1.46(TP-46) U7.9(TP-9)
MWR/: J1.45(TP-45) U7.10(TP-10)
N00036_6360: L6.2(TP-2) R3.1(TP-1) R4.1(TP-1) U1.5(TP-5) U1.8(TP-8) U6.5(TP-5)
N00038_6372: C21.1(TP-1) L3.2(TP-2) U1.4(TP-4)
N00044_6366: U6.1(TP-1) U23.2(TP-2)
N00046_6362: R4.2(TP-2) U6.8(TP-8)
N00048_6359: R3.2(TP-2) U6.2(TP-2)
N00060_6368: U1.6(TP-6) U23.3(TP-3)
OUTA: L1.1(TP-1) U23.6(TP-6)
OUTC: L4.1(TP-1) U22.6(TP-6)
RA0: U3.5(TP-5) U4.5(TP-5) U8.5(TP-5) U9.5(TP-5) U10.5(TP-5) U11.5(TP-5) U12.5(TP-5) U13.5(TP-5) U16.58(TP-58)
RA1: U3.4(TP-4) U4.4(TP-4) U8.4(TP-4) U9.4(TP-4) U10.4(TP-4) U11.4(TP-4) U12.4(TP-4) U13.4(TP-4) U16.60(TP-60)
RA2: U3.3(TP-3) U4.3(TP-3) U8.3(TP-3) U9.3(TP-3) U10.3(TP-3) U11.3(TP-3) U12.3(TP-3) U13.3(TP-3) U16.61(TP-61)
RA3: U3.2(TP-2) U4.2(TP-2) U8.2(TP-2) U9.2(TP-2) U10.2(TP-2) U11.2(TP-2) U12.2(TP-2) U13.2(TP-2) U16.62(TP-62)
RA4: U3.32(TP-32) U4.32(TP-32) U8.32(TP-32) U9.32(TP-32) U10.32(TP-32) U11.32(TP-32) U12.32(TP-32) U13.32(TP-32) U16.63(TP-63)
RA5: U3.31(TP-31) U4.31(TP-31) U8.31(TP-31) U9.31(TP-31) U10.31(TP-31) U11.31(TP-31) U12.31(TP-31) U13.31(TP-31) U16.64(TP-64)
RA6: U3.30(TP-30) U4.30(TP-30) U8.30(TP-30) U9.30(TP-30) U10.30(TP-30) U11.30(TP-30) U12.30(TP-30) U13.30(TP-30) U16.65(TP-65)
RA7: U3.29(TP-29) U4.29(TP-29) U8.29(TP-29) U9.29(TP-29) U10.29(TP-29) U11.29(TP-29) U12.29(TP-29) U13.29(TP-29) U16.66(TP-66)
RA8: U3.28(TP-28) U4.28(TP-28) U8.28(TP-28) U9.28(TP-28) U10.28(TP-28) U11.28(TP-28) U12.28(TP-28) U13.28(TP-28) U16.67(TP-67)
RA9: U3.22(TP-22) U4.22(TP-22) U8.22(TP-22) U9.22(TP-22) U10.22(TP-22) U11.22(TP-22) U12.22(TP-22) U13.22(TP-22) U16.69(TP-69)
RA10: U3.21(TP-21) U4.21(TP-21) U8.21(TP-21) U9.21(TP-21) U10.21(TP-21) U11.21(TP-21) U12.21(TP-21) U13.21(TP-21) U16.70(TP-70)
RA11: U3.20(TP-20) U4.20(TP-20) U8.20(TP-20) U9.20(TP-20) U10.20(TP-20) U11.20(TP-20) U12.20(TP-20) U13.20(TP-20) U16.71(TP-71)
RA12: U3.19(TP-19) U4.19(TP-19) U8.19(TP-19) U9.19(TP-19) U10.19(TP-19) U11.19(TP-19) U12.19(TP-19) U13.19(TP-19) U16.76(TP-76)
RA13: U3.18(TP-18) U4.18(TP-18) U8.18(TP-18) U9.18(TP-18) U10.18(TP-18) U11.18(TP-18) U12.18(TP-18) U13.18(TP-18) U16.77(TP-77)
RA14: U3.15(TP-15) U4.15(TP-15) U8.15(TP-15) U9.15(TP-15) U10.15(TP-15) U11.15(TP-15) U12.15(TP-15) U13.15(TP-15) U16.78(TP-78)
RA15: U3.14(TP-14) U4.14(TP-14) U8.14(TP-14) U9.14(TP-14) U10.14(TP-14) U11.14(TP-14) U12.14(TP-14) U13.14(TP-14) U16.79(TP-79)
RD0: U4.26(TP-26) U8.26(TP-26) U9.26(TP-26) U10.26(TP-26) U16.81(TP-81)
RD1: U4.23(TP-23) U8.23(TP-23) U9.23(TP-23) U10.23(TP-23) U16.82(TP-82)
RD2: U4.10(TP-10) U8.10(TP-10) U9.10(TP-10) U10.10(TP-10) U16.83(TP-83)
RD3: U4.7(TP-7) U8.7(TP-7) U9.7(TP-7) U10.7(TP-7) U16.84(TP-84)
RD4: U3.26(TP-26) U11.26(TP-26) U12.26(TP-26) U13.26(TP-26) U16.1(TP-1)
RD5: U3.23(TP-23) U11.23(TP-23) U12.23(TP-23) U13.23(TP-23) U16.2(TP-2)
RD6: U3.10(TP-10) U11.10(TP-10) U12.10(TP-10) U13.10(TP-10) U16.3(TP-3)
RD7: U3.7(TP-7) U11.7(TP-7) U12.7(TP-7) U13.7(TP-7) U16.4(TP-4)
RDY/: J1.50(TP-50) U7.22(TP-22)
RESET/: J1.53(TP-53) U16.15(TP-15)
SEL: U7.23(TP-23) U16.13(TP-13)
V+12: C1.1(TP-1) C6.1(TP-1) J1.63(TP-63) J1.64(TP-64) U5.4(TP-4) U6.4(TP-4) U22.7(TP-7) U23.7(TP-7)
VCLKA: U1.11(TP-11) U2.11(TP-11) U15.11(TP-11) U16.34(TP-34)
VCLKC: R11.2(TP-2) U17.11(TP-11)
VD0: R7.2(TP-2) U14.2(TP-2) U15.2(TP-2) U16.39(TP-39) U17.2(TP-2)
VD1: R13.2(TP-2) U14.3(TP-3) U15.3(TP-3) U16.40(TP-40) U17.3(TP-3)
VD2: R14.2(TP-2) U14.4(TP-4) U15.4(TP-4) U16.41(TP-41) U17.4(TP-4)
VD3: R15.2(TP-2) U14.5(TP-5) U15.5(TP-5) U16.42(TP-42) U17.5(TP-5)
VD4: R9.2(TP-2) U14.6(TP-6) U15.6(TP-6) U16.43(TP-43) U17.6(TP-6)
VD5: R8.2(TP-2) U14.7(TP-7) U15.7(TP-7) U16.44(TP-44) U17.7(TP-7)
VD6: R10.2(TP-2) U14.8(TP-8) U15.8(TP-8) U16.45(TP-45) U17.8(TP-8)
VD7: R16.2(TP-2) U14.9(TP-9) U15.9(TP-9) U16.46(TP-46) U17.9(TP-9)
WAIT/: J1.51(TP-51) U16.33(TP-33)
WSTAT/: U14.11(TP-11) U16.56(TP-56)
N00036: L2.2(TP-2) R5.1(TP-1) R6.1(TP-1) U2.5(TP-5) U2.8(TP-8) U5.5(TP-5)
N00038: C22.1(TP-1) L5.2(TP-2) U2.4(TP-4)
N00044: U5.1(TP-1) U22.2(TP-2)
N00046: R5.2(TP-2) U5.8(TP-8)
N00048: R6.2(TP-2) U5.2(TP-2)
N00060: U2.6(TP-6) U22.3(TP-3)
N00306: U1.12(TP-12) U15.19(TP-19)
N00318: U1.15(TP-15) U15.16(TP-16)
N00322: U1.16(TP-16) U15.15(TP-15)
N00671: C19.1(TP-1) R16.1(TP-1)
N00689: C5.1(TP-1) R10.1(TP-1)
N00703: C8.1(TP-1) R8.1(TP-1)
N00717: C16.1(TP-1) R9.1(TP-1)
N00827: C17.1(TP-1) R15.1(TP-1)
N00831: C20.1(TP-1) R14.1(TP-1)
N00835: C24.1(TP-1) R13.1(TP-1)
N00837: C7.1(TP-1) R7.1(TP-1)
N04966: L3.1(TP-1) L5.1(TP-1)
N05690: U2.12(TP-12) U17.19(TP-19)
N05692: U2.18(TP-18) U17.13(TP-13)
N05694: U2.13(TP-13) U17.18(TP-18)
N05696: U2.19(TP-19) U17.12(TP-12)
N05698: U2.17(TP-17) U17.14(TP-14)
N05700: U2.14(TP-14) U17.17(TP-17)
N05702: U2.15(TP-15) U17.16(TP-16)
N05704: U2.16(TP-16) U17.15(TP-15)
N11940: U1.13(TP-13) U15.18(TP-18)
N11950: U1.14(TP-14) U15.17(TP-17)
N11984: U1.17(TP-17) U15.14(TP-14)
N11994: U1.18(TP-18) U15.13(TP-13)
N12004: U1.19(TP-19) U15.12(TP-12)
N19706: R1.1(TP-1) U14.18(TP-18)
N19710: R2.1(TP-1) U14.16(TP-16)
N19714: R17.1(TP-1) U14.14(TP-14)
N19718: R12.1(TP-1) U14.12(TP-12)
N19934: D4.2(TP-2) R12.2(TP-2)
N19938: D3.2(TP-2) R17.2(TP-2)
N19942: D1.2(TP-2) R2.2(TP-2)
N23417: U10.6(TP-6) U13.6(TP-6) U16.48(TP-48)
N23878: R11.1(TP-1) U16.36(TP-36)
N24816: U16.14(TP-14) U18.1(TP-1)
N24821: U16.10(TP-10) U18.2(TP-2)
N24826: U16.11(TP-11) U18.3(TP-3) U18.4(TP-4)
N84247: U19.9(TP-9) U20.22(TP-22) U21.9(TP-9) U21.12(TP-12)
N103899: U19.8(TP-8) U19.12(TP-12) U20.19(TP-19) U20.23(TP-23) U21.8(TP-8) U21.11(TP-11)
N255822: D2.2(TP-2) R1.2(TP-2)
N314771: U3.6(TP-6) U4.6(TP-6) U16.51(TP-51)
N315146: U9.6(TP-6) U11.6(TP-6) U16.50(TP-50)
N315333: U8.6(TP-6) U12.6(TP-6) U16.49(TP-49)
N320476: U3.11(TP-11) U4.11(TP-11) U8.11(TP-11) U9.11(TP-11) U10.11(TP-11) U11.11(TP-11) U12.11(TP-11) U13.11(TP-11) U16.57(TP-57)
N336036: C23.1(TP-1) J2.1(TP-1) L1.2(TP-2)
N336041: C18.1(TP-1) J3.1(TP-1) L4.2(TP-2)

Pads without a net: J1 12 48 49 65 66; J2 3 4; J3 3 4; MTH1 1; MTH2 1; MTH3 1; U3 1 8 9 12 13 16 17 24 25; U4 1 8 9 12 13 16 17 24 25; U7 7; U8 1 8 9 12 13 16 17 24 25; U9 1 8 9 12 13 16 17 24 25; U10 1 8 9 12 13 16 17 24 25; U11 1 8 9 12 13 16 17 24 25; U12 1 8 9 12 13 16 17 24 25; U13 1 8 9 12 13 16 17 24 25; U14 13 15 17 19; U16 5 26 27 32 35 37 38 47 55 59 68; U18 5 6 7 8; U19 11; U20 20; U22 1 5 8; U23 1 5 8; U25 1 2 3 4 5 6 7 8 9 11 12 13 14 15 16 17 18 19

## Via types
v1: diameter 1.016, hole 0.457, TOP to BOTTOM, 247 vias
v2: diameter 0.61, hole 0.33, TOP to BOTTOM, 182 vias

## Routing (per net, layer and track width the routed paths; a pad name or vN(x,y) marks a point on that pad's centre or on a via; arc(x,y) is an arc through that point)
AGND: length 25
  TOP w0.381: v1(84.67,21.59) U1.10 ; U6.3 v1(110.07,13.97) ; v1(84.67,38.73) U2.10 ; 82.55,34.92 v1(84.67,34.92) ; U1.3 v1(84.67,12.7) ; v1(110.07,35.56) U5.3 ; v1(84.67,17.78) U1.7 ; U2.3 v1(84.67,29.84)
  BOTTOM w0.381: C22.2 80.12,31.22 v1(80.22,31.12) ; v1(106.89,9.31) 106.81,9.23 C6.2 ; v1(107.53,31.54) 107.44,31.45 C1.2 ; C21.2 v1(78.11,20.11)
GND: length 240.7
  TOP w0.381: v1(85.3,66.04) 85.09,66.25 U12.27 v1(85.09,70.06) ; U16.17 35.64,101.73 v1(35.56,101.81) ; U19.28 v1(18.84,84.45) ; v1(109.22,70.06) U11.27 109.22,66.25 v1(109.43,66.04) ; U21.48 v1(18.84,48.26) ; U20.25 v1(18.84,38.1) ; v1(64.77,78.95) U16.53 ; U14.1 v1(54.4,55.88) ; v1(32.6,77.47) U19.10 ; U20.28 v1(18.84,36.2) ; U20.24 v1(32.6,38.1) ; v1(18.84,25.4) U20.45 ; U20.39 v1(18.84,29.21) ; U8.27 85.09,80.22 v1(85.3,80.01) ; v1(18.84,73.66) U19.45 ; v1(18.84,71.75) U19.48 ; U16.75 v1(64.77,111.97) ; v1(109.43,80.01) 109.43,80.91 109.22,81.13 U10.27 v1(109.22,84.03) ; U19.1 v1(32.6,71.75) ; U2.20 v1(70.91,27.3) ; v1(54.4,38.73) U17.1 ; U20.34 v1(18.84,32.38) ; v1(32.6,50.16) U21.4 ; v1(32.6,53.98) 30.48,53.98 ; U19.34 v1(18.84,80.64) ; v1(32.6,60.96) U21.21 ; U16.74 68.5,108.08 v1(68.58,108.16) ; v1(50.38,73.02) U25.10 ; U20.15 v1(32.6,32.38) ; 21.08,53.98 v1(18.84,53.98) ; v1(85.09,98) U13.27 85.09,95.1 85.3,94.88 v1(85.3,93.98) ; U19.39 v1(18.84,77.47) ; v1(54.4,10.16) U15.10 ; U21.34 v1(18.84,57.15) ; U20.4 v1(32.6,25.4) ; v1(32.6,57.15) U21.15 ; U21.1 v1(32.6,48.26) ; v1(32.6,80.64) U19.15 ; v1(109.22,111.97) U4.27 ; U14.10 v1(54.4,44.45) ; v1(109.22,98) U3.27 ; v1(32.6,84.45) U19.21 ; v1(54.4,21.59) U15.1 ; U21.45 v1(18.84,50.16) ; U1.1 v1(84.67,10.16) ; v1(54.4,27.3) U17.10 ; v1(84.67,27.3) U2.1 ; v1(85.09,111.97) U9.27 85.09,108.8 v1(85.94,107.95) ; U20.21 v1(32.6,36.2) ; v1(32.6,73.66) U19.4 ; U21.28 v1(18.84,60.96) ; v1(70.91,10.16) U1.20 ; U20.10 v1(32.6,29.21)
  BOTTOM w0.381: C10.2 24,68.92 v1(23.92,69) ; C15.2 24,21.29 v1(23.92,21.38) ; v1(109.43,66.04) 109.43,66.89 109.35,66.98 C14.2 ; C11.2 24,46.06 v1(23.92,46.14) ; v1(85.09,70.06) 85.09,70.97 85.3,71.18 v1(85.3,80.01) 85.3,80.86 85.22,80.95 85.22,83 85.09,83.13 85.09,84.94 85.3,85.15 v1(85.3,93.98) 85.3,94.83 85.22,94.92 85.22,95.89 ; v1(40.43,23.28) 40.41,23.27 C7.2 ; v1(23.92,91.23) 24,91.14 C9.2 ; C20.2 v1(38.73,16.51) ; C24.2 v1(38.73,19.05) ; v1(109.22,70.06) 109.22,70.97 109.43,71.18 v1(109.43,80.01) 109.43,80.86 109.35,80.95 C12.2 109.35,83 109.22,83.13 v1(109.22,84.03) 108.58,84.67 108.58,91.43 109.43,92.29 v1(109.43,93.98) 109.43,94.83 109.35,94.92 C13.2 109.35,96.97 109.22,97.1 v1(109.22,98) 108.58,98.64 108.58,104.77 109.43,105.62 v1(109.43,107.95) 109.43,108.8 109.35,108.89 C4.2 109.35,110.94 109.22,111.07 v1(109.22,111.97) ; 85.22,67.95 85.22,66.98 85.3,66.89 v1(85.3,66.04) ; v1(38.73,13.97) C17.2 ; C8.2 v1(38.73,8.89) ; v1(74.3,22.65) 74.4,22.75 C2.2 ; v1(85.09,98) 85.09,107.1 v1(85.94,107.95) 85.94,108.8 85.85,108.89 C25.2 ; C19.2 38.73,3.81 v1(38.73,6.35) C5.2 ; v1(70.91,10.16) 70.91,7.62 C3.2 ; v1(38.73,11.43) C16.2
  vias: v1(85.09,84.03) v1(85.09,84.03) v1(85.09,84.03)
GND_EARTH: length 5.5
  BOTTOM w0.381: C18.2 v1(117.9,26.67) ; C23.2 v1(117.9,24.13)
VCC: length 173.9
  TOP w0.381: U19.7 v1(32.6,75.56) ; v1(58.42,111.97) U16.80 ; v1(18.84,52.07) U21.42 ; U1.2 v1(84.67,11.43) ; v1(35.56,103.08) 35.64,103 U16.16 ; U25.20 v1(37.68,61.59) ; U21.31 v1(18.84,59.05) ; U21.7 v1(32.6,52.07) ; U20.7 v1(32.6,27.3) ; v1(18.84,75.56) U19.42 ; U19.31 v1(18.84,82.55) ; U21.18 v1(32.6,59.05) ; v1(84.67,20.32) U1.9 ; U19.18 v1(32.6,82.55) ; U2.2 v1(84.67,28.58) ; U20.31 v1(18.84,34.29) ; v1(32.6,34.29) U20.18 ; U14.20 v1(67.1,55.88) ; v1(84.67,37.46) 82.55,37.46 ; 66.55,105.54 68.5,105.54 v1(68.58,105.62) ; v1(63.5,78.95) U16.52 ; v1(18.84,27.3) U20.42 ; U15.20 v1(68.16,21.59) ; U17.20 v1(68.16,38.73)
  BOTTOM w0.381: C28.1 v1(81.92,69.64) 81.92,70.54 81.98,70.61 81.98,79.03 81.85,79.16 81.85,80.3 81.92,80.36 C27.1 v1(81.92,83.61) 82.56,84.25 82.56,90.52 81.92,91.16 C26.1 v1(81.92,97.58) 81.92,101.25 82.61,101.95 82.61,102.52 81.98,103.16 81.98,107.53 81.51,108.01 81.51,108.81 C25.1 v1(82.55,111.76) ; v1(27.3,46.14) C11.1 ; v1(79.38,26.88) C2.1 ; v1(27.3,91.23) C9.1 ; C3.1 v1(79.38,9.74) ; v1(106.05,111.55) C4.1 106.05,107.67 106.11,107.6 106.11,106.46 105.98,106.33 105.98,98.55 106.05,98.48 v1(106.05,97.58) C13.1 106.05,93 105.58,92.53 105.58,88.74 106.11,88.2 106.11,84.58 106.05,84.51 v1(106.05,83.61) C12.1 105.58,81.45 105.58,78.87 106.11,78.34 106.11,70.61 106.05,70.54 v1(106.05,69.64) C14.1 106.05,66.33 105.58,65.86 105.58,64.95 105.98,64.54 105.98,60.74 106.11,60.61 106.11,60.04 106.05,59.97 106.05,50.8 D3.1 ; v1(27.3,21.38) C15.1 ; v1(27.3,69) C10.1
RA0: length 117.2
  TOP w0.203: U13.5 83.82,87.66 v2(84.43,88.27) ; U9.5 v2(83.82,104.14) ; v2(83.82,60.96) U12.5 ; v2(109.65,103.5) 108.18,103.5 107.95,103.28 U4.5 ; U10.5 107.95,74.3 109.22,75.56 v2(110.49,75.56) ; v2(109.86,90.17) 107.95,88.27 U3.5 ; v2(107.95,60.32) U11.5 ; v2(83.82,74.93) U8.5
  BOTTOM w0.203: v2(83.82,60.96) 84.43,61.57 84.43,65.02 83.82,65.63 v2(83.82,74.93) 84.43,75.54 84.43,80.75 84.15,81.03 84.15,82.8 84.28,82.93 84.28,84.37 84.43,84.52 v2(84.43,88.27) 84.43,94.56 83.82,95.17 83.82,101.3 84.25,101.73 84.25,103.71 v2(83.82,104.14) ; v2(107.95,60.32) 107.95,60.96 110.49,63.5 v2(110.49,75.56) 110.49,76.17 110.41,76.25 110.41,83.99 109.86,84.55 v2(109.86,90.17) 110.49,90.8 110.49,97.88 109.65,98.72 v2(109.65,103.5)
RA1: length 111.8
  TOP w0.203: v2(81.28,90.8) 82.55,89.53 U13.4 ; v2(81.28,76.2) 82.55,74.93 U8.4 ; U10.4 106.68,74.5 v2(107.11,74.93) ; v2(82.55,60.32) U12.4 ; U4.4 v2(106.68,102.23) ; v2(106.68,61.59) U11.4 ; v2(106.68,88.9) U3.4 ; U9.4 82.55,101.6 v2(81.92,102.23)
  BOTTOM w0.203: v2(81.92,102.23) 81.43,101.75 81.43,101.64 81.42,101.63 81.42,101.13 81.05,100.76 81.05,91.64 81.28,91.41 v2(81.28,90.8) 81.28,84.12 80.85,83.69 80.85,81.03 81.28,80.59 v2(81.28,76.2) 81.28,70.15 81.1,69.98 81.1,69.09 80.85,68.83 80.85,67.06 81.03,66.88 81.53,66.88 81.89,66.52 81.89,64.52 81.28,63.91 81.28,62.46 82.55,61.19 v2(82.55,60.32) ; v2(106.68,61.59) 106.68,64.54 106.07,65.15 106.07,65.66 107.11,66.7 v2(107.11,74.93) 106.68,75.36 106.68,76.47 107.01,76.8 107.01,78.14 106.07,79.08 106.07,80.26 106.43,80.62 106.71,80.62 107.11,81.03 107.11,88.47 v2(106.68,88.9) 106.68,90.17 106.07,90.78 106.07,92.33 106.54,92.8 106.54,94.42 107.11,95 107.11,101.8 v2(106.68,102.23)
RA2: length 111.9
  TOP w0.203: U9.3 81.28,102.87 v2(80.01,104.14) ; U13.3 81.28,88.06 81.08,88.27 v2(80.01,88.27) ; v2(104.78,88.27) 105.41,87.63 U3.3 ; v2(105.41,74.93) U10.3 ; v2(105.41,60.32) U11.3 ; v2(80.01,75.56) 81.28,74.3 U8.3 ; U4.3 v2(105.41,102.87) ; v2(81.28,61.59) U12.3
  BOTTOM w0.203: v2(105.41,102.87) 105.41,98.09 105.23,97.92 105.23,97.03 104.78,96.57 v2(104.78,88.27) 104.78,75.56 v2(105.41,74.93) 104.55,74.07 104.55,66.85 105.08,66.31 105.08,64.74 105.41,64.41 v2(105.41,60.32) ; v2(81.28,61.59) 80.01,62.86 v2(80.01,75.56) 79.4,76.17 79.4,87.66 v2(80.01,88.27) 80.44,88.7 80.44,89.33 80.26,89.51 80.04,89.51 79.83,89.71 79.83,100.73 80.61,101.5 80.61,101.97 80.62,101.98 80.62,102.9 80.01,103.5 v2(80.01,104.14)
RA3: length 130
  TOP w0.203: U9.2 v2(80.01,102.23) 80.67,101.57 80.67,99.29 81.03,98.93 86.49,98.93 87,98.42 90.54,98.42 91.25,97.71 101.68,97.71 v2(102.23,97.16) ; U4.2 104.14,99.06 v2(103.51,98.42) ; v2(80.01,60.96) U12.2 ; v2(78.11,74.3) 79.81,74.3 80.01,74.09 U8.2 ; v2(102.23,84.45) 103.02,84.45 104.14,85.57 U3.2 ; v2(104.14,61.59) U11.2 ; v2(102.23,70.48) 103.94,70.48 104.14,70.69 U10.2 ; U13.2 80.01,87.15 79.58,87.58 79.43,87.58 v2(78.74,88.27)
  BOTTOM w0.203: v2(103.51,98.42) v2(102.23,97.16) v2(102.23,84.45) v2(102.23,70.48) 102.23,69.85 102.84,69.24 102.84,65.79 102.23,65.18 102.23,63.5 v2(104.14,61.59) ; v2(80.01,102.23) 80.01,101.48 79.38,100.85 79.38,88.9 v2(78.74,88.27) 78.74,74.93 v2(78.11,74.3) 78.11,67.95 79.6,66.45 79.6,62.69 80.01,62.29 v2(80.01,60.96)
RA4: length 112.2
  TOP w0.203: v2(102.23,66.04) 102.23,67.31 U11.32 ; U4.32 v2(102.87,107.95) ; U9.32 78.74,108.46 v2(77.6,107.31) ; U10.32 102.87,78.94 102.67,78.74 v2(101.6,78.74) ; v2(101.6,92.71) 102.87,93.98 U3.32 ; v2(77.47,95.89) U13.32 ; v2(77.47,81.91) U8.32 ; U12.32 78.74,67.16 77.5,65.91 77.5,62.84 77.58,62.75 77.58,62.73 v2(77.09,62.23)
  BOTTOM w0.203: v2(102.23,66.04) 101.6,66.67 v2(101.6,78.74) v2(101.6,92.71) 101.6,97.1 102.87,98.37 v2(102.87,107.95) ; v2(77.6,107.31) 77.6,96.62 77.47,96.49 v2(77.47,95.89) 77.47,95.28 77.6,95.15 77.6,91.8 77.5,91.69 77.5,82.55 77.47,82.52 v2(77.47,81.91) 77.47,75.1 77.09,74.72 v2(77.09,62.23)
RA5: length 113.1
  TOP w0.203: U9.31 80.01,107.95 v2(79.38,107.31) ; v2(103.51,80.01) 103.94,80.01 104.14,80.21 U10.31 ; U11.31 104.14,67.16 103.53,66.55 103.53,64.77 103.51,64.74 v2(103.51,64.14) ; U8.31 80.01,82.7 79.4,83.31 78.61,83.31 v2(78.11,83.82) ; v2(102.87,92.08) 102.87,92.94 104.14,94.21 U3.31 ; U12.31 80.01,67.16 79.58,66.73 79.43,66.73 v2(78.11,65.41) ; U4.31 v2(104.14,106.05) ; U13.31 80.01,95.1 v2(78.5,93.59)
  BOTTOM w0.203: v2(79.38,107.31) 78.93,106.87 78.93,94.02 v2(78.5,93.59) 78.5,92.98 78.11,92.58 v2(78.11,83.82) 78.11,75.16 77.5,74.55 77.5,67.95 78.11,67.34 v2(78.11,65.41) ; v2(104.14,106.05) 103.51,105.41 103.51,99.24 103.71,99.03 103.76,99.03 104.11,98.68 104.11,98.17 103.76,97.82 103.71,97.82 102.87,96.98 v2(102.87,92.08) 102.87,80.64 v2(103.51,80.01) v2(103.51,64.14)
  vias: v2(73.66,91.44) v2(73.66,81.28)
RA6: length 114
  TOP w0.203: U4.30 v2(105.41,107.31) ; U9.30 v2(81.28,106.05) ; U10.30 105.41,79.38 v2(104.14,78.11) ; U8.30 81.28,78.74 v2(80.01,77.47) ; U11.30 105.41,67.16 104.57,66.32 104.57,65.84 v2(104.14,65.41) ; U3.30 105.41,93.98 104.78,93.34 v2(104.14,93.34) ; U13.30 81.28,94.18 v2(80.44,93.34) ; v2(81.28,64.77) U12.30
  BOTTOM w0.203: v2(104.14,65.41) v2(104.14,78.11) v2(104.14,93.34) 104.14,96.51 104.78,97.15 104.78,106.68 v2(105.41,107.31) ; v2(81.28,64.77) 80.44,65.61 80.44,69 80.64,69.21 80.64,76.83 v2(80.01,77.47) 80.85,78.31 80.85,80.45 80.44,80.86 80.44,83.86 80.85,84.27 80.85,89.5 80.44,89.91 v2(80.44,93.34) 80.44,100.76 81.01,101.33 81.01,101.8 81.03,101.81 81.03,102.41 81.05,102.44 81.05,104.75 80.85,104.95 80.85,105.61 v2(81.28,106.05)
RA7: length 111.3
  TOP w0.203: v2(82.55,63.5) U12.29 ; v2(106.68,65.41) U11.29 ; U13.29 82.55,94.67 82.75,94.47 82.75,94.41 v2(83.19,93.98) ; U4.29 v2(106.68,106.05) ; v2(106.68,92.08) U3.29 ; v2(106.68,80.01) U10.29 ; U9.29 v2(82.55,107.95) ; v2(82.55,80.01) U8.29
  BOTTOM w0.203: v2(82.55,107.95) 83.16,107.34 83.16,104.92 82.8,104.56 82.8,103.72 83.16,103.36 83.16,101.79 82.98,101.61 82.98,94.85 83.19,94.65 v2(83.19,93.98) 83.19,80.64 v2(82.55,80.01) 82.98,79.58 82.98,75.53 82.8,75.35 82.8,74.51 82.98,74.33 82.98,63.93 v2(82.55,63.5) ; v2(106.68,106.05) 107.52,105.21 107.52,94.83 107.11,94.42 107.11,92.51 v2(106.68,92.08) 107.52,91.24 107.52,80.85 v2(106.68,80.01) 106.68,79.04 107.54,78.18 107.54,75.36 107.72,75.18 107.72,70.87 107.52,70.66 107.52,66.24 v2(106.68,65.41)
RA8: length 111.4
  TOP w0.203: U9.28 v2(83.82,106.68) ; v2(107.95,64.14) U11.28 ; U4.28 v2(107.95,107.31) ; v2(83.82,64.77) U12.28 ; v2(83.82,78.74) U8.28 ; v2(107.95,93.34) U3.28 ; v2(83.82,92.71) U13.28 ; v2(107.95,78.74) U10.28
  BOTTOM w0.203: v2(107.95,64.14) 107.95,64.74 108.13,64.92 108.13,66.63 107.92,66.84 107.92,70.49 108.13,70.7 108.13,75.35 107.95,75.53 v2(107.95,78.74) v2(107.95,93.34) v2(107.95,107.31) ; v2(83.82,106.68) 83.82,105 83.21,104.39 83.21,103.89 83.57,103.53 83.57,101.62 83.41,101.47 83.41,95 83.79,94.61 83.79,93.78 83.82,93.76 v2(83.82,92.71) 83.82,83.05 83.74,82.97 83.74,80.86 83.82,80.78 v2(83.82,78.74) 83.82,75.79 83.21,75.18 83.21,74.68 83.39,74.5 83.39,65.2 v2(83.82,64.77)
RA9: length 102.8
  TOP w0.203: U4.22 v2(115.57,107.31) ; v2(91.44,64.77) U12.22 ; v2(115.57,70.48) U11.22 ; v2(115.57,84.45) U10.22 ; v2(115.57,93.98) U3.22 ; U9.22 v2(91.44,106.68) ; v2(91.44,78.74) U8.22 ; v2(91.44,93.98) U13.22
  BOTTOM w0.203: v2(115.57,107.31) 116.18,106.71 116.18,94.59 v2(115.57,93.98) 116.2,93.34 116.2,85.09 v2(115.57,84.45) 116.18,83.85 116.18,71.09 v2(115.57,70.48) ; v2(91.44,106.68) 90.83,106.07 90.83,94.59 v2(91.44,93.98) 91.44,92.08 90.83,91.47 90.83,79.35 v2(91.44,78.74) 90.81,78.11 90.81,65.41 v2(91.44,64.77)
RA10: length 101.6
  TOP w0.203: U4.21 v2(116.84,105.41) ; v2(92.71,80.01) U8.21 ; v2(116.84,79.38) U10.21 ; v2(92.71,66.04) U12.21 ; v2(116.84,92.71) U3.21 ; U9.21 v2(92.71,107.95) ; v2(116.84,66.04) U11.21 ; v2(92.71,93.34) U13.21
  BOTTOM w0.203: v2(116.84,66.04) v2(116.84,79.38) v2(116.84,92.71) v2(116.84,105.41) ; v2(92.71,107.95) v2(92.71,93.34) v2(92.71,80.01) v2(92.71,66.04)
RA11: length 109.9
  TOP w0.203: v2(118.11,76.83) U10.20 ; U9.20 v2(93.98,106.68) ; v2(93.98,78.74) U8.20 ; v2(93.98,64.77) U12.20 ; v2(118.11,64.77) U11.20 ; v2(118.11,93.98) U3.20 ; U4.20 v2(118.11,107.31) ; v2(93.98,92.71) U13.20
  BOTTOM w0.203: v2(93.98,106.68) v2(93.98,92.71) v2(93.98,78.74) v2(93.98,64.77) ; v2(118.11,64.77) v2(118.11,76.83) v2(118.11,93.98) v2(118.11,107.31)
RA12: length 104
  TOP w0.203: v2(95.25,93.98) U13.19 ; v2(119.38,79.38) U10.19 ; U9.19 v2(95.25,107.95) ; U4.19 v2(119.38,105.41) ; v2(119.38,92.71) U3.19 ; v2(95.25,66.04) U12.19 ; v2(119.38,66.04) U11.19 ; v2(95.25,80.01) U8.19
  BOTTOM w0.203: v2(119.38,66.04) 118.77,66.65 118.77,78.77 v2(119.38,79.38) 118.75,80.01 118.75,92.08 v2(119.38,92.71) 118.77,93.32 118.77,104.8 v2(119.38,105.41) ; v2(95.25,66.04) 94.62,66.67 94.62,74.93 95.25,75.56 v2(95.25,80.01) 94.64,80.62 94.64,93.37 v2(95.25,93.98) 94.64,94.59 94.64,107.34 v2(95.25,107.95)
RA13: length 109.8
  TOP w0.203: v2(97.16,65.41) 96.52,66.04 U12.18 ; U9.18 v2(96.52,107.31) ; v2(120.65,93.98) U3.18 ; v2(120.65,65.41) U11.18 ; U4.18 v2(120.65,107.31) ; v2(97.16,93.34) 96.52,93.98 U13.18 ; v2(97.16,78.74) 97.16,80.49 96.52,81.13 U8.18 ; v2(120.65,77.47) U10.18
  BOTTOM w0.203: v2(97.16,65.41) v2(97.16,78.74) v2(97.16,93.34) 98.22,93.34 98.42,93.55 98.42,105.41 v2(96.52,107.31) ; v2(120.65,65.41) v2(120.65,77.47) 120.65,89.94 120.04,90.55 120.04,91.06 120.65,91.67 v2(120.65,93.98) 120.04,94.59 120.04,106.71 v2(120.65,107.31)
RA14: length 133.4
  TOP w0.203: U10.15 120.65,73.66 v2(121.28,74.3) ; v2(96.52,89.53) U13.15 ; v2(120.65,98.42) U4.15 120.65,103.5 119.41,104.75 110.42,104.75 110.22,104.96 96.47,104.96 95.91,104.39 95.91,103.48 v2(96.52,102.87) U9.15 ; v2(96.52,62.23) U12.15 ; v2(120.65,90.8) U3.15 ; v2(120.65,60.96) U11.15 ; v2(96.52,75.56) U8.15
  BOTTOM w0.203: v2(120.65,98.42) 121.26,97.82 121.26,91.41 v2(120.65,90.8) 121.26,90.2 121.26,74.93 121.28,74.9 v2(121.28,74.3) 121.28,62.23 120.65,61.59 v2(120.65,60.96) ; v2(96.52,62.23) v2(96.52,75.56) v2(96.52,89.53) v2(96.52,102.87)
RA15: length 134.9
  TOP w0.203: v2(119.38,61.59) U11.14 ; v2(95.25,88.9) U13.14 ; v2(95.25,74.3) U8.14 ; v2(95.25,60.96) U12.14 ; v2(119.38,74.93) U10.14 ; v2(119.38,98.42) U4.14 119.38,101.12 116.36,104.14 110.46,104.14 110.05,104.55 103.66,104.55 98.4,99.29 98.4,101.37 98.04,101.73 97.54,101.73 97.18,101.37 97.18,99.34 96.77,98.93 96.27,98.93 95.25,99.95 U9.14 v2(95.25,102.87) ; v2(119.38,84.45) U3.14
  BOTTOM w0.203: v2(95.25,60.96) 95.86,61.57 95.86,73.69 v2(95.25,74.3) 95.86,74.9 95.86,88.29 v2(95.25,88.9) 95.86,89.51 95.86,102.26 v2(95.25,102.87) ; v2(119.38,61.59) 119.38,65.23 119.58,65.43 119.63,65.43 119.99,65.79 119.99,66.29 119.81,66.47 119.81,74.5 v2(119.38,74.93) 119.99,75.54 119.99,83.85 v2(119.38,84.45) 119.84,84.91 119.84,90.18 119.63,90.38 119.63,91.23 119.99,91.58 119.99,93.62 119.38,94.23 v2(119.38,98.42)
RD0: length 58.2
  TOP w0.203: U10.26 110.49,84.76 110.29,84.96 104.65,84.96 103.51,83.82 87.48,83.82 86.36,82.7 U8.26 ; U4.26 110.49,107.86 108.04,105.41 90.02,105.41 86.36,109.07 U9.26
RD1: length 91.4
  TOP w0.203: U9.23 90.17,110.64 92.56,113.03 111.91,113.03 114.3,110.64 U4.23 v2(114.3,105.41) ; U10.23 v2(114.3,79.38) 114.3,77.67 114.1,77.47 90.37,77.47 90.17,77.67 U8.23
  BOTTOM w0.203: v2(114.3,105.41) 114.3,89.76 113.69,89.15 113.69,79.98 v2(114.3,79.38)
RD2: length 88.3
  TOP w0.203: U9.10 90.17,99.54 90.47,99.24 90.88,99.24 91.19,98.93 95.69,98.93 96.1,98.53 96.94,98.53 97.02,98.6 98.29,98.6 103.83,104.14 109.88,104.14 110.54,103.48 113.06,103.48 v2(113.67,102.87) 114.3,102.23 U4.10 ; v2(114.3,74.93) U10.10 114.3,71.6 113.69,70.99 105.67,70.99 104.53,69.85 99.7,69.85 98.55,70.99 91.19,70.99 90.17,72.01 U8.10
  BOTTOM w0.203: v2(114.3,74.93) 113.28,75.95 113.28,89.32 113.67,89.71 v2(113.67,102.87)
RD3: length 58.9
  TOP w0.203: U4.7 110.49,99.54 109.88,98.93 104.62,98.93 104.11,98.42 104.11,98.17 103.76,97.82 103.25,97.82 102.64,98.42 98.69,98.42 98.46,98.2 97.19,98.2 97.11,98.12 95.93,98.12 95.52,98.53 91.02,98.53 90.71,98.83 87.17,98.83 86.36,99.64 U9.7 ; U10.7 110.49,74.57 111.62,75.71 111.62,76 111.42,76.2 89.38,76.2 86.36,73.18 U8.7
RD4: length 67.6
  TOP w0.203: U13.26 86.36,96.67 87.48,97.79 90.6,97.79 91.08,97.31 99.52,97.31 100.33,96.49 100.33,93.12 102.01,91.44 106.05,91.44 106.07,91.47 106.93,91.47 108.64,93.17 109.77,93.17 110.24,93.64 110.24,94.24 110.49,94.49 U3.26 ; U11.26 110.49,63.7 110.29,63.5 100.53,63.5 100.33,63.7 100.33,67.06 97.13,70.26 87.88,70.26 86.36,68.73 U12.26
RD5: length 89.2
  TOP w0.203: U13.23 v2(90.17,93.34) 90.17,92.48 91.62,91.03 102.4,91.03 102.41,91.03 106.22,91.03 106.24,91.06 107.1,91.06 108.81,92.76 109.94,92.76 110.65,93.47 110.65,93.56 111.58,94.49 113.69,94.49 114.3,95.1 U3.23 ; U11.23 114.3,64.97 112.19,62.86 97.33,62.86 96.92,63.27 91.67,63.27 90.17,64.77 U12.23 v2(90.17,69.85)
  BOTTOM w0.203: v2(90.17,93.34) 90.17,92.71 89.74,92.28 89.51,92.28 88.9,91.67 88.9,88.9 90.17,87.63 v2(90.17,69.85)
RD6: length 94.8
  TOP w0.203: U3.10 v2(114.3,88.9) 111.58,91.62 109.29,91.62 108.7,91.03 107.66,91.03 107.27,90.65 106.39,90.63 102.58,90.63 102.57,90.62 91.45,90.62 90.63,91.44 v2(89.53,91.44) ; U12.10 90.17,62.23 90.81,62.86 96.75,62.86 97.16,62.46 112.36,62.46 112.77,62.86 113.67,62.86 v2(114.3,62.23) U11.10 ; v2(90.17,88.9) U13.10
  BOTTOM w0.203: v2(90.17,88.9) 89.53,89.53 v2(89.53,91.44) ; v2(114.3,88.9) 114.3,80.24 114.91,79.63 114.91,79.12 114.3,78.51 114.3,75.79 114.91,75.18 114.91,74.68 114.3,74.07 v2(114.3,62.23)
RD7: length 60.2
  TOP w0.203: U11.7 110.49,57.63 109.37,56.52 87.48,56.52 86.36,57.63 U12.7 ; U3.7 110.49,87.15 110.92,87.58 111.33,87.58 111.76,88.01 111.76,90.6 111.21,91.15 110.77,91.19 109.43,91.19 108.87,90.63 107.83,90.63 107.45,90.25 106.56,90.22 106.56,90.22 102.75,90.22 102.74,90.22 91.28,90.22 90.69,90.8 90.02,90.8 86.36,87.15 U13.7
N314771: length 81.9
  TOP w0.203: v2(110.49,102.87) 109.86,102.87 109.22,102.23 U4.6 ; U16.51 62.23,77.04 62.43,76.83 65.41,76.83 73.53,84.96 98.3,84.96 103.15,89.81 106.73,89.81 106.73,89.82 107.62,89.84 108,90.22 109.04,90.22 109.6,90.78 110.11,90.78 110.46,90.42 110.87,90.42 111.12,90.17 v2(111.12,88.9) 109.86,88.9 109.22,88.27 U3.6
  BOTTOM w0.203: v2(111.12,88.9) 111.12,98.42 110.49,99.06 v2(110.49,102.87)
N315333: length 20
  TOP w0.203: v2(85.09,60.32) U12.6 ; U8.6 85.09,73.79 v2(86.23,74.93)
  BOTTOM w0.203: v2(85.09,60.32) 86.28,61.52 86.28,68.83 86.23,68.88 v2(86.23,74.93)
N320476: length 105.2
  TOP w0.203: v2(91.44,88.9) U13.11 ; v2(91.44,60.32) U12.11 ; v2(91.44,74.3) U8.11 ; v2(115.57,76.83) U10.11 ; U9.11 v2(91.44,102.87) ; v2(115.57,90.17) U3.11 ; v2(115.57,60.96) U11.11 ; U4.11 v2(115.57,98.42)
  BOTTOM w0.203: v2(91.44,60.32) 92.05,60.93 92.05,73.69 v2(91.44,74.3) 92.05,74.9 92.05,88.29 v2(91.44,88.9) 92.05,89.51 92.05,102.26 v2(91.44,102.87) ; v2(115.57,98.42) 115.57,97.79 114.94,97.16 114.94,90.8 v2(115.57,90.17) 114.96,89.56 114.96,80.15 115.32,79.8 115.32,78.95 114.96,78.6 114.96,77.44 v2(115.57,76.83) 114.96,76.23 114.96,75.71 115.32,75.35 115.32,74.51 114.96,74.15 114.96,61.57 v2(115.57,60.96)

## Copper pours and planes (outline as drawn; the poured copper is in the pictures)
AGND on GND: 0,21.59 8.89,21.59 8.89,19.05 17.78,19.05 25.4,11.43 29.21,11.43 36.2,4.45 50.17,4.45 52.07,6.35 76.84,6.35 76.84,40.64 87,40.64 87,28.58 82.55,28.58 82.55,24.13 87.63,24.13 87.63,11.43 82.55,11.43 82.55,6.35 104.78,6.35 104.78,38.73 111.12,38.73 111.12,0 21.59,0 21.59,5.08 0,5.08
GND on GND: 21.59,5.08 0,5.08 0,109.22 21.59,109.22 21.59,114.3 123.19,114.3 125.73,111.76 125.73,2.54 123.19,0 21.59,0
GND_EARTH on GND: 111.12,0 123.19,0 125.73,2.54 125.73,45.72 111.12,45.72
VCC on POWER: 21.59,5.08 0,5.08 0,109.22 21.59,109.22 21.59,114.3 123.19,114.3 125.73,111.76 125.73,2.54 123.19,0 21.59,0
